# Altium PCB demo_dermis_chip1_package.PcbDoc (part 1 of 2)
Units mm, origin at the board's own origin, x right, y up, seen from the top; angles counter-clockwise.
Board outline 51.99 x 52.15 mm, 2 copper layers (Top Layer, Bottom Layer); 25 components, 82 nets, 198 pads, 241 vias.
Unrouted connection lines stored in the file: 1.
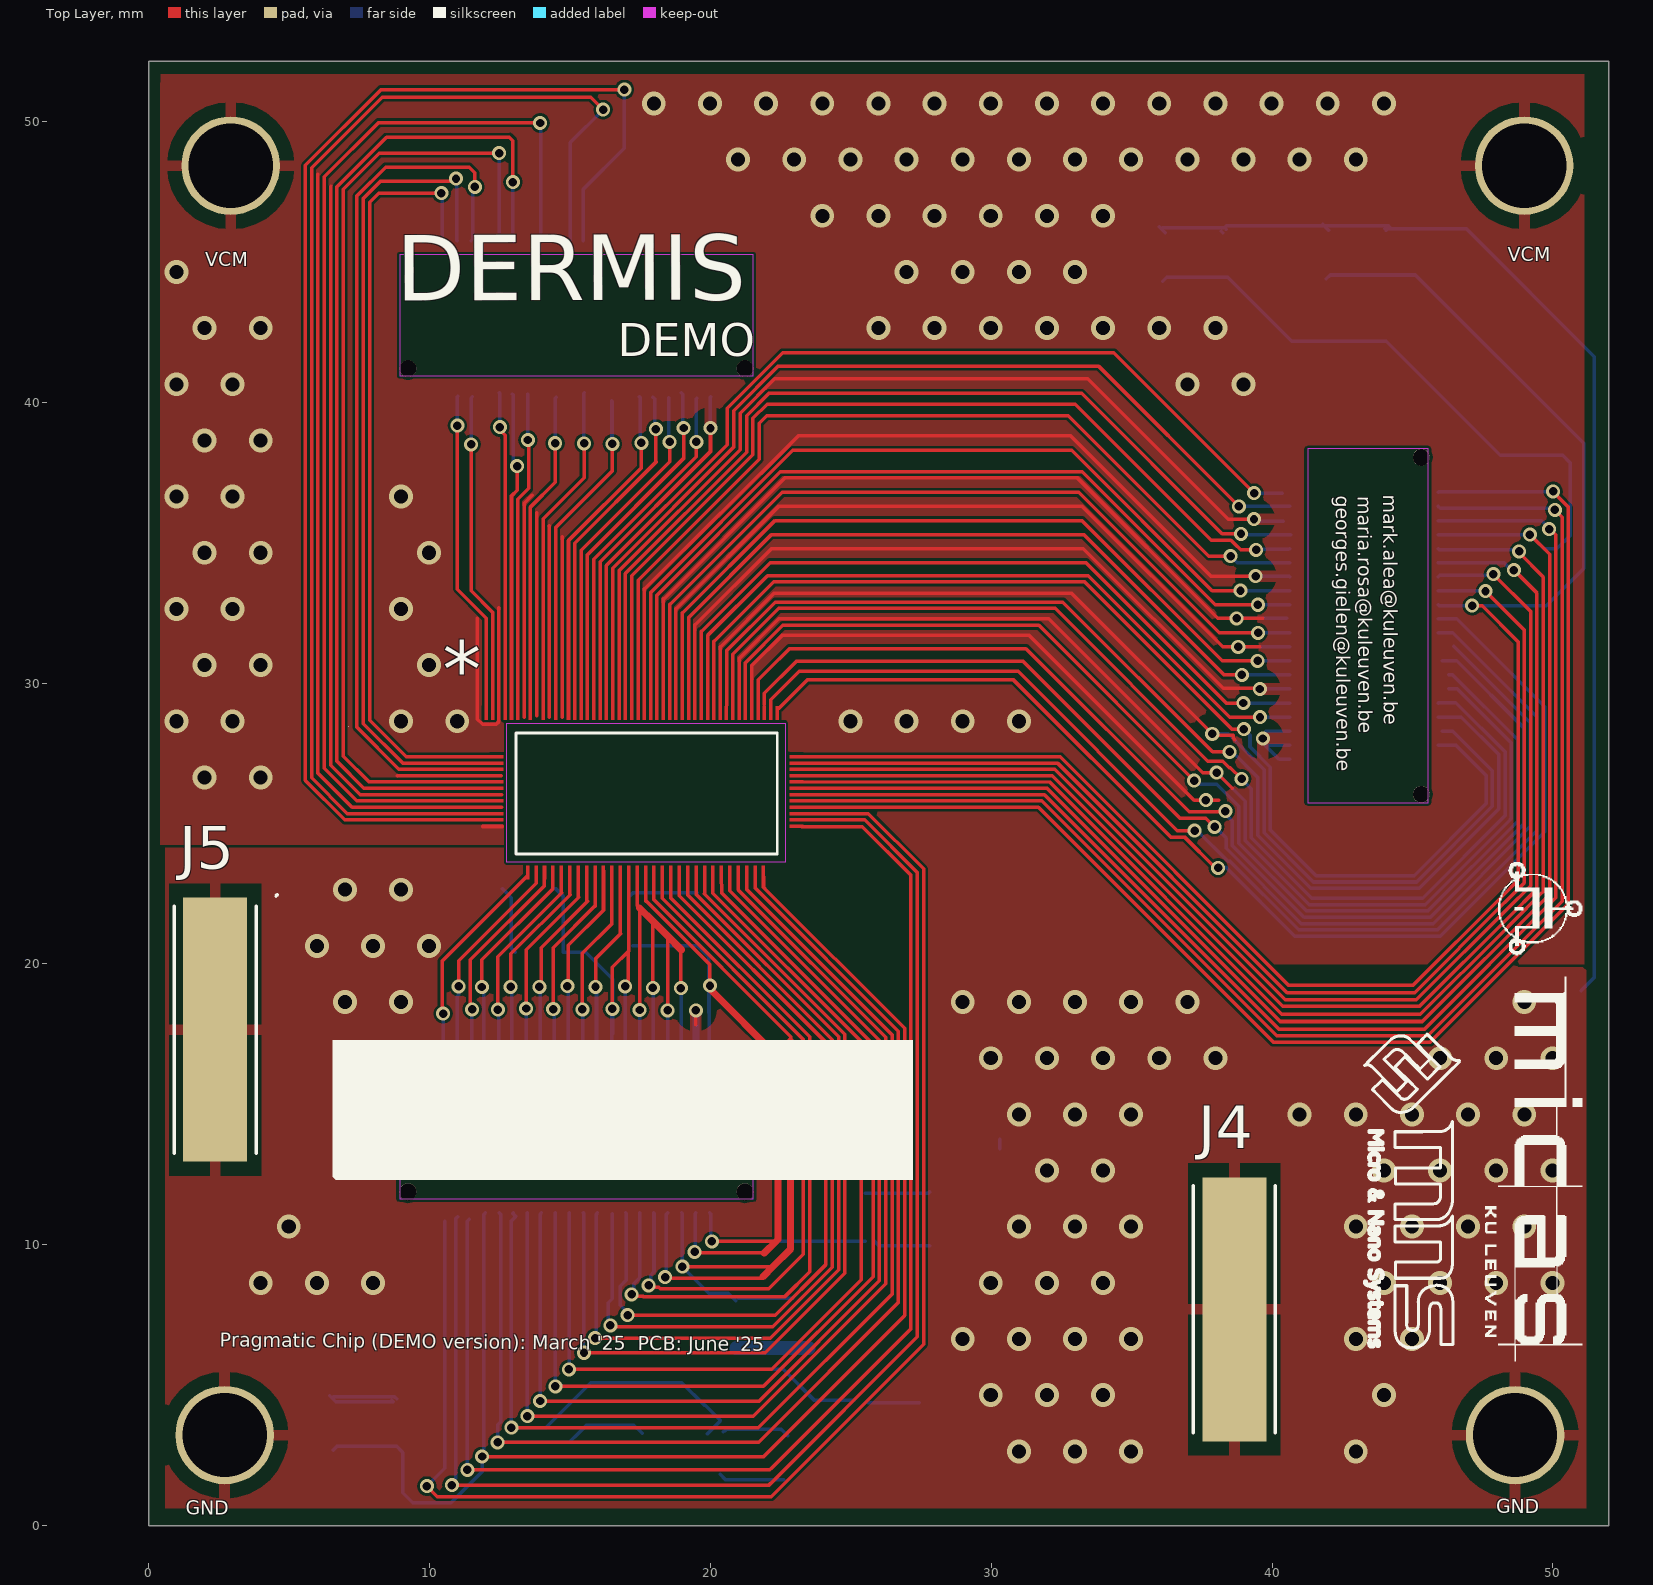
[diagram p0: Top Layer view]
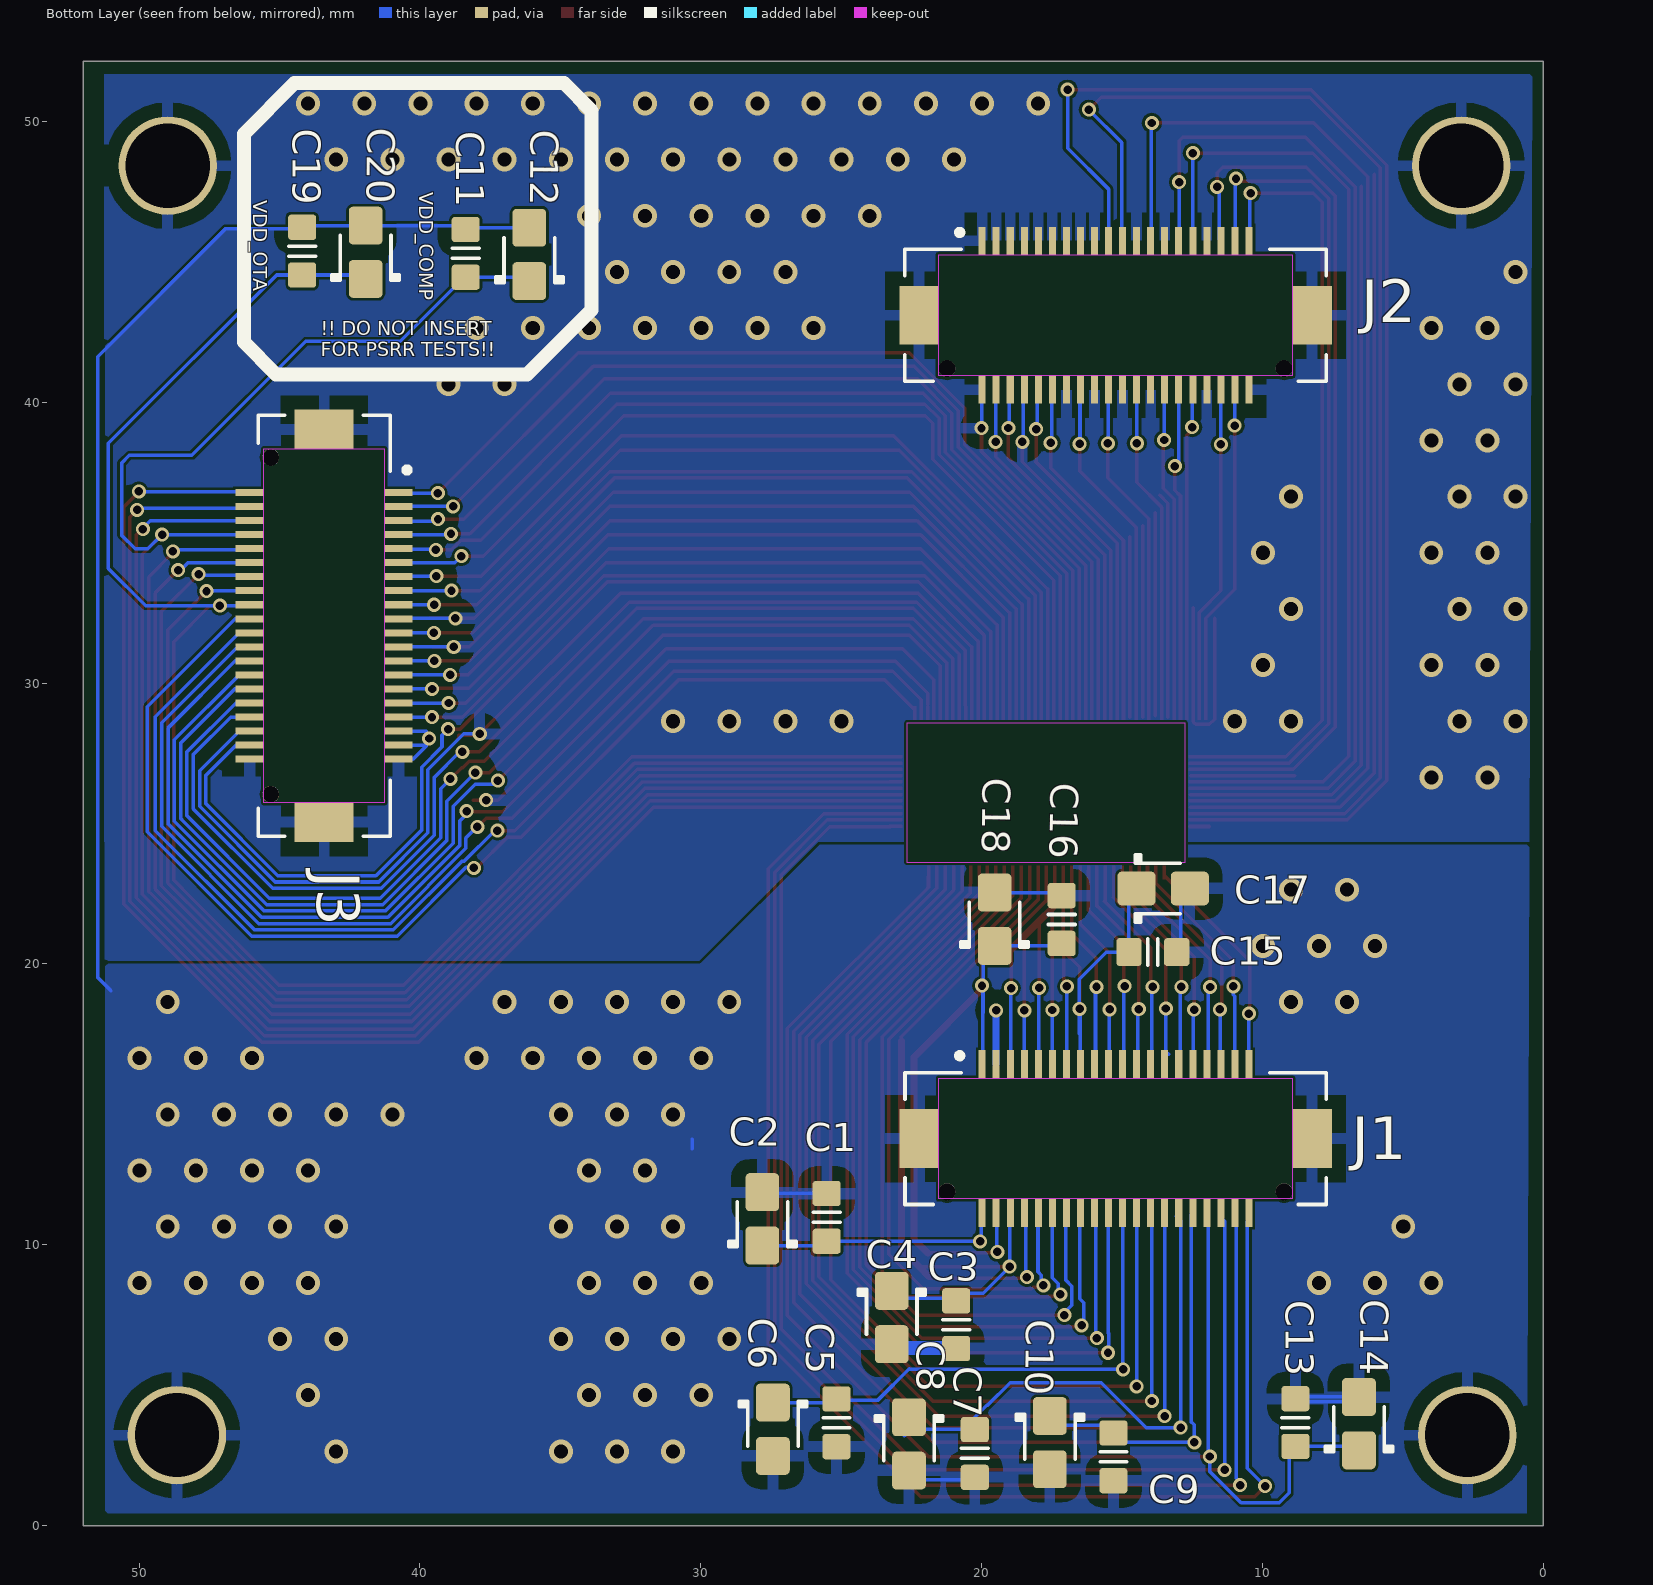
[diagram p1: Bottom Layer view, seen from below]
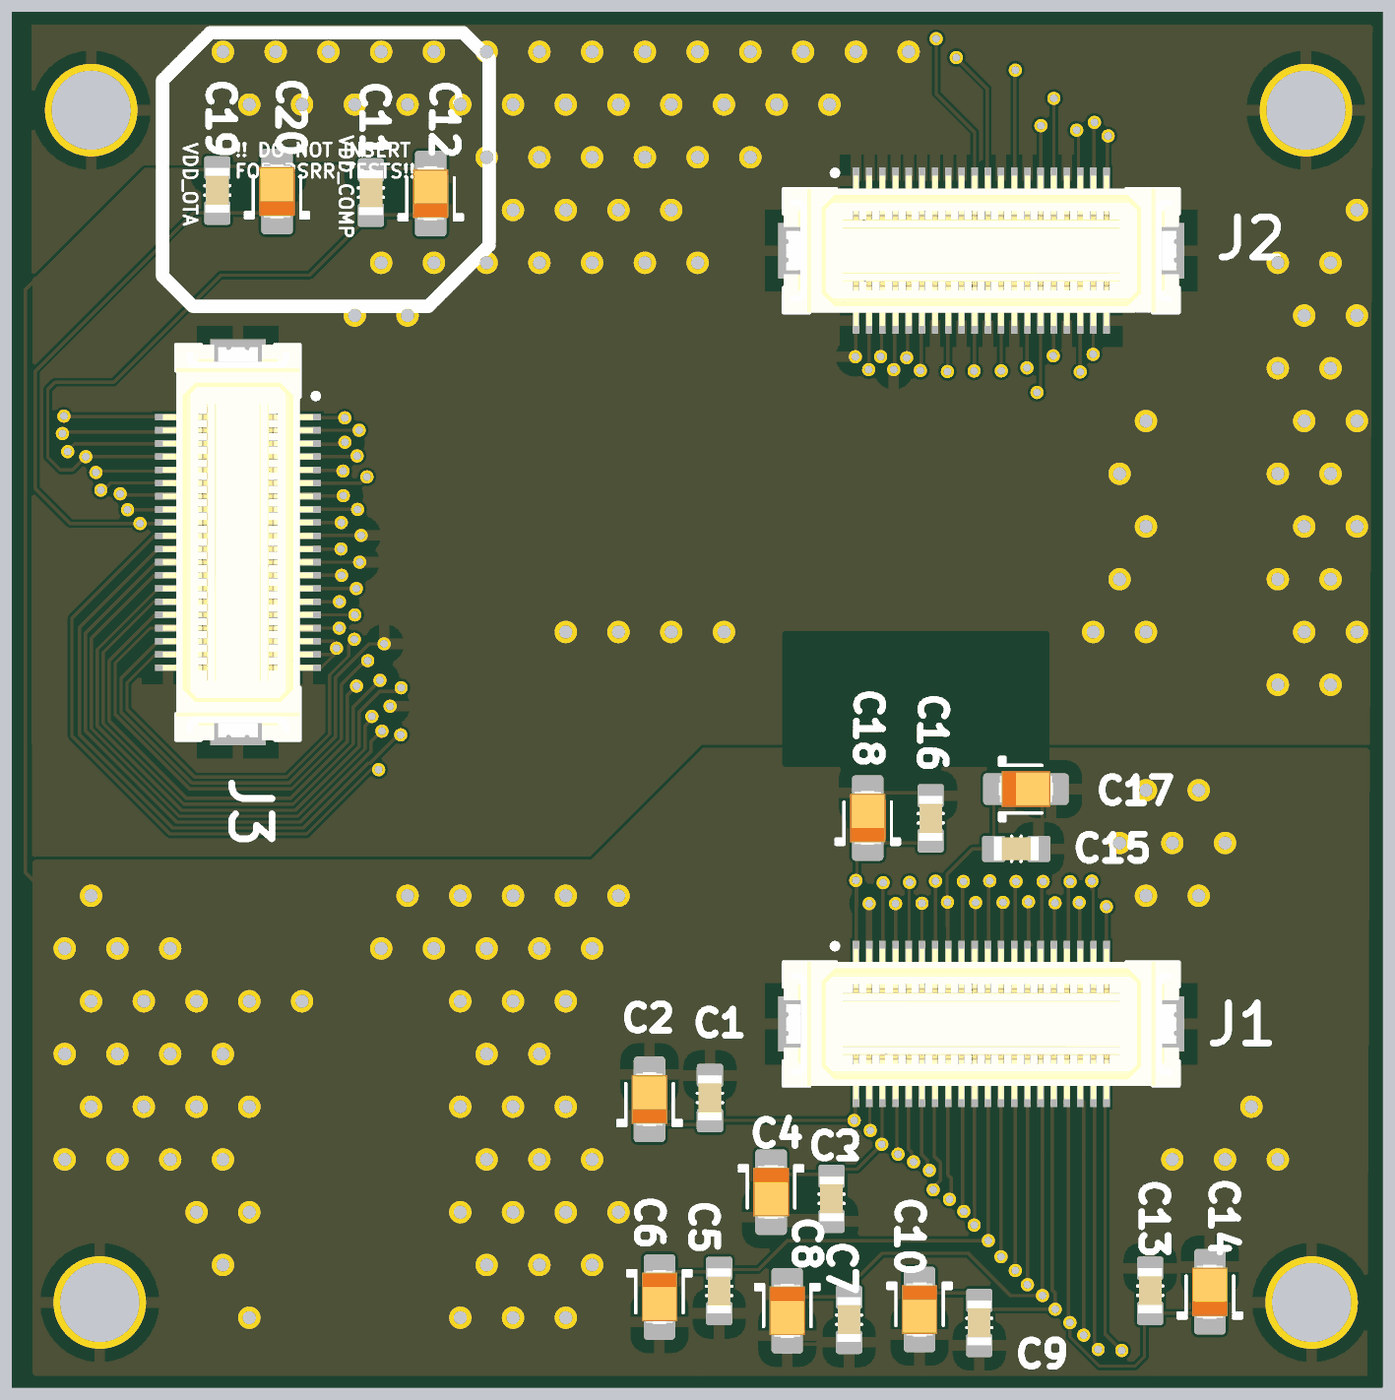
[diagram p3: 3D render of the assembled board from below, using the file's embedded part models]

## Layer stack, top to bottom
Top Solder: solder mask 0.0102, Solder Resist, Dk 3.5
Top Layer: signal copper 0.0356
Dielectric 1: dielectric 0.32, FR-4, Dk 4.8
Bottom Layer: signal copper 0.0356
Bottom Solder: solder mask 0.0102, Solder Resist, Dk 3.5

## Board outline
0,0 51.994,0 51.994,52.152 0,52.152

## Design rules (kind name [scope] priority, off if disabled: settings)
BoardOutlineClearance [All] p1: gap=0.25 ignorepadtopadclearanceinfootprint=FALSE except(0: Arc-SplitContinuation Track-SplitContinuation SMDPad-SplitContinuation THPad-SplitContinuation Via-SplitContinuation Fill-SplitContinuation Poly-SplitContinuation Region-SplitContinuation Text-SplitContinuation)
Clearance Clearance-xPP-xTP-xTT [All] p1: gap=0.1 ignorepadtopadclearanceinfootprint=FALSE except(0: Arc-Hole Track-Hole SMDPad-Hole THPad-Hole Via-Hole Fill-Hole Poly-Hole Region-Hole Text-Hole)
ComponentClearance [All] p1: gap=0.25 collisioncheckmode=3 verticalgap=0.25 showdistances=FALSE
DiffPairsRouting [All] p1: maxlimit=0.25 minlimit=0.25 mostfreqgap=0.25 toplayer_minwidth=0.381 toplayer_maxwidth=0.381 toplayer_prefwidth=0.381 bottomlayer_minwidth=0.381 bottomlayer_maxwidth=0.381 bottomlayer_prefwidth=0.381 maxuncoupledlength=12.5
Height [All] p1: minheight=0 maxheight=25 prefheight=12.5
HoleSize HoleSize-PTH [All] p1: absolutevalues=TRUE maxlimit=2 minlimit=0.15 maxpercent=80.000 minpercent=20.000
HoleToHoleClearance [All] p1: gap=0.35 allowstackedmicrovias=TRUE
MinimumAnnularRing "Minimum IAR  <= 0.45mm" [((ObjectKind = 'Pad') OR (ObjectKind = 'Via')) And (Layer = 'MultiLayer') And (HoleDiameter <= AsMM(0.45))] p1: minimumring=0.125 // minimum inner annular ring for pads <= 0.45mm finished hole size
MinimumAnnularRing "Minimum IAR  > 0.45mm" [((ObjectKind = 'Pad') OR (ObjectKind = 'Via')) And (Layer = 'MultiLayer') And (HoleDiameter > AsMM(0.45))] p2: minimumring=0.125 // minimum inner annular ring for pads > 0.45mm finished hole size
MinimumAnnularRing Minimum-IAR [All] p3: minimumring=0.125
MinimumSolderMaskSliver [All] p1: minsoldermaskwidth=0.08
PlaneClearance PlaneClearance-IPI [All] p1: clearance=0.25
PlaneConnect [All] p1: planeconnectstyle=Relief reliefexpansion=0.15 reliefentries=4 reliefconductorwidth=0.4 reliefairgap=0.4
PolygonConnect PolygonConnect-xTW [All] p1: connectstyle=Relief reliefconductorwidth=0.4 reliefentries=4 polygonreliefangle="90 Angle" airgapwidth=0.5
RoutingCorners [All] p1: cornerstyle=45-Degree minsetback=2.5 maxsetback=2.5
RoutingVias "RoutingVias <= 0.45mm" [(ObjectKind = 'Via') And (HoleDiameter <= AsMM(0.45))] p1: holewidth=0.3 width=0.5 viastyle="Through Hole" minholewidth=0.15 minwidth=0.5 maxholewidth=0.3 maxwidth=0.5 useviatemplates=TRUE viatemplateguid#1={678C6236-A811-44EE-9C79-08C2DEEF3F28} viatemplatename#1=v50h30
RoutingVias "RoutingVias > 0.45mm" [(ObjectKind = 'Via') And (HoleDiameter > AsMM(0.45))] p2: holewidth=0.3 width=0.5 viastyle="Through Hole" minholewidth=0.5 minwidth=0.85 maxholewidth=0.5 maxwidth=1.25 useviatemplates=TRUE viatemplateguid#1={678C6236-A811-44EE-9C79-08C2DEEF3F28} viatemplatename#1=v50h30
SilkToSilkClearance [All] p1: silktosilkclearance=0.2
SilkToSolderMaskClearance SilkscreenOverComponentPads [IsPad] p1: minsilkscreentomaskgap=0.2 clearancetoexposedcopper=TRUE
SolderMaskExpansion [All] p1: expansion=0
UnRoutedNet [All] p1: checkbadconnections=TRUE
Width Width-xTW [All] p1: maxlimit=1.5 minlimit=0.1 preferedwidth=0.2
18 further rules are at their usual default settings.

## Components (designator, comment, footprint, x,y, rotation, side; value= is the part's Value field where it differs from the comment)
C1 "approved sub OK" CAPC1608N 25.516,10.977 r90 bottom value=100n
C2 "10µ" CAPMP2012X150USR 27.807,10.924 r90 bottom
C3 "approved sub OK" CAPC1608N 20.903,7.155 r270 bottom value=100n
C4 "10µ" CAPMP2012X150USR 23.198,7.41 r270 bottom
C5 "approved sub OK" CAPC1608N 25.166,3.66 r270 bottom value=100n
C6 "10µ" CAPMP2012X150USR 27.429,3.431 r270 bottom
C7 "approved sub OK" CAPC1608N 20.241,2.569 r270 bottom value=100n
C8 "10µ" CAPMP2012X150USR 22.585,2.909 r270 bottom
C9 "approved sub OK" CAPC1608N 15.303,2.448 r270 bottom value=100n
C10 "10µ" CAPMP2012X150USR 17.567,2.955 r270 bottom
C11 "approved sub OK" CAPC1608N 38.37,45.308 r90 bottom value=100n
C12 "10µ" CAPMP2012X150USR 36.106,45.268 r90 bottom
C13 "approved sub OK" CAPC1608N 8.823,3.669 r90 bottom value=100n
C14 "10µ" CAPMP2012X150USR 6.559,3.63 r90 bottom
C15 "approved sub OK" CAPC1608N 13.899,20.424 r180 bottom value=100n
C16 "approved sub OK" CAPC1608N 17.147,21.584 r90 bottom value=100n
C17 "10µ" CAPMP2012X150USR 13.532,22.688 r180 bottom
C18 "10µ" CAPMP2012X150USR 19.532,21.595 r90 bottom
C19 "approved sub OK" CAPC1608N 44.195,45.387 r90 bottom value=100n
C20 "10µ" CAPMP2012X150USR 41.931,45.347 r90 bottom
J1 "DF17(4.0)-40DS-0.5V(57)" HRS_DF17(4.0)-40DS-0.5V(57) 15.227,13.784 r180 bottom locked
J2 "DF17(4.0)-40DS-0.5V(57)" HRS_DF17(4.0)-40DS-0.5V(57) 15.228,43.103 r180 bottom
J3 "DF17(4.0)-40DS-0.5V(57)" HRS_DF17(4.0)-40DS-0.5V(57) 43.412,32.043 r270 bottom
J4 "S1711-46R" HARWIN_S1711-46R 38.66,7.7 r270 top
J5 "S1711-46R" HARWIN_S1711-46R 2.36,17.66 r270 top

## Footprints (in the part's own frame and the unit in brackets; to place one, negate y for a bottom-side part, rotate by r counter-clockwise, add the part's x,y. Pads: shape width x height; smd on the part's side, far side on the other; paste and mask are expansions set on the pad)
CAPC1608N [mm]
  round 0.254 on Mech14: 0(0,0)
  rrect25% 0.9x1 smd: 1(-0.85,0) 2(0.85,0)
  Top Layer pour cut-out: -0.4,0.6 0.4,0.6 0.4,-0.6 -0.4,-0.6
  silkscreen extent -0.18,-0.48 0.18,0.48, body extent -0.85,-0.45 0.85,0.45, height 0.89
CAPMP2012X150USR [mm]
  round 0.254 on Mech14: 0(0,0)
  rrect25% 1.35x1.2 smd: 1(-0.95,0) 2(0.95,0)
  Top Layer pour cut-out: -0.4,0.8 0.4,0.8 0.4,-0.8 -0.4,-0.8
  silkscreen extent -1,-1.2 0.6,1.2, body extent -1.02,-0.67 1.03,0.68, height 1.5
HARWIN_S1711-46R [mm]
  rect 9.4x2.28 smd: 1(0,0)
  silkscreen extent -4.39,-1.46 4.39,1.46
HRS_DF17(4.0)-40DS-0.5V(57) [mm]
  rect 0.25x1 smd: 1(-4.75,2.65) 2(-4.75,-2.65) 3(-4.25,2.65) 4(-4.25,-2.65) 5(-3.75,2.65) 6(-3.75,-2.65) 7(-3.25,2.65) 8(-3.25,-2.65) 9(-2.75,2.65) 10(-2.75,-2.65) 11(-2.25,2.65) 12(-2.25,-2.65) 13(-1.75,2.65) 14(-1.75,-2.65) 15(-1.25,2.65) 16(-1.25,-2.65) 17(-0.75,2.65) 18(-0.75,-2.65) 19(-0.25,2.65) 20(-0.25,-2.65) 21(0.25,2.65) 22(0.25,-2.65) 23(0.75,2.65) 24(0.75,-2.65) 25(1.25,2.65) 26(1.25,-2.65) 27(1.75,2.65) 28(1.75,-2.65) 29(2.25,2.65) 30(2.25,-2.65) 31(2.75,2.65) 32(2.75,-2.65) 33(3.25,2.65) 34(3.25,-2.65) 35(3.75,2.65) 36(3.75,-2.65) 37(4.25,2.65) 38(4.25,-2.65) 39(4.75,2.65) 40(4.75,-2.65)
  rect 1.4x2.1 smd: S1(-7,0) S2(7,0)
  round 0.6 hole 0.6 unplated: ""(-6,-1.9) ""(6,-1.9)
  Keep-Out Layer region: 6.3,-2.15 -6.301,-2.15 -6.301,2.15 6.3,2.15
  silkscreen extent -7.5,-2.35 7.5,3.05, body extent -7.5,-2.85 7.5,2.85, height 4.5

## Part data
C1 C3 C5 C7 C9 C11 C13 C15 C16 C19: library part CAPC_100n_0603, "Capacitor SMD Cer 100nF 10% 50V X7R 0603", Manufacturer 1="AVX Corporation", Manufacturer 2="TDK Corporation", Manufacturer Part Number 1=06035C104KAT2A, Manufacturer Part Number 2=C1608X7R1H104K, Package / Case="0603 (1608 Metric)", Ratings="50V; X7R", Supplier Part Number 1=478-5052-1-ND, Tolerance=±10%, ComponentLink1Description=http://www.avx.com/docs/Catalogs/cx7r.pdf, ComponentLink1URL=http://www.avx.com/docs/Catalogs/cx7r.pdf, ComponentLink2Description=http://product.tdk.com/capacitor/mlcc/en/documents/mlcc_commercial_general_en.pdf, ComponentLink2URL=http://product.tdk.com/capacitor/mlcc/en/documents/mlcc_commercial_general_en.pdf, Material=ceramic, Supplier 1=Digi-Key, Supplier 2=Digi-Key, Supplier Part Number 2=445-1314-1-ND
C2 C4 C6 C8 C10 C12 C14 C17 C18 C20: library part CAPT_10u_0805_10V, "Capacitor SMD Tantalum 10uF 20% 10V 0805", Manufacturer 1="AVX Corporation", Manufacturer Part Number 1=TAJP106M010RNJ, Package / Case="0805 (2012 metric)", Ratings=10V, Supplier Part Number 1=478-3281-1-ND, Tolerance=±20%, Material=Tantalum, Supplier 1=Digi-Key
J1 J2 J3: "recept, PC Board, Headers & Receptacles, gold, fit, straight, metal, pos, Connectors and Adapters, connector, Connect...", Package=None, Availability="In Stock", Check_prices=https://www.snapeda.com/parts/DF17(4.0)-40DS-0.5V(57)/Hirose+Electric+Co+Ltd/view-part/?ref=eda, MF="Hirose Electric", MP=DF17(4.0)-40DS-0.5V(57), Price=None, Purchase-URL=https://pricing.snapeda.com/search/part/DF17(4.0)-40DS-0.5V(57)/?ref=eda, SnapEDA_Link=https://www.snapeda.com/parts/DF17(4.0)-40DS-0.5V(57)/Hirose+Electric+Co+Ltd/view-part/?ref=snap
J4 J5: "RFI SHIELD CLIP TIN SMD", Package=None, Availability=Warning, Check_prices=https://www.snapeda.com/parts/S1711-46R/Harwin%20Inc./view-part/2172610/?ref=eda, MF="Harwin Inc.", MP=S1711-46R, Price=None, Purchase-URL=https://pricing.snapeda.com/search/part/S1711-46R/?ref=eda, SnapEDA_Link=https://www.snapeda.com/parts/S1711-46R/Harwin%20Inc./view-part/2172610/?ref=snap

## Free pads (board coordinates)
  round 3.508 hole 3 mask+0: 1(2.915,48.429) 2(48.978,48.431) 3(2.701,3.222) 4(48.654,3.222)

## Via types
v1: diameter 0.85, hole 0.5, Top Layer to Bottom Layer, 141 vias
v2: diameter 0.5, hole 0.3, Top Layer to Bottom Layer, 100 vias

## Nets (pads, with @x,y where several pads share a name; then routed paths per layer and width w, separated by ;. In a path a pad name is that pad's centre, name@x,y a point inside that pad or via, vN(x,y) a via of type N, cw(c..) or ccw(c..) an arc to the next point about the centre after c; other vN are vias at no path point)
ACK: J1.37 | length 7.8
  Top Layer w0.125: v2(11.035,19.201) 11.035,20.119 13.791,22.875 13.791,23.085
  Bottom Layer w0.125: J1.37@10.98,16.439 10.98,18.851 11.035,18.906 v2(11.035,19.201)
ADDRX0: J1.31 | length 7.5
  Top Layer w0.125: v2(12.431,18.376) 12.431,20.264 14.698,22.531 ; 14.69,22.531 14.69,23.023
  Bottom Layer w0.125: v2(12.431,18.376) 12.455,18.352 12.455,16.464 J1.31@12.48,16.439
ADDRX1: J1.29 | length 7.8
  Top Layer w0.125: v2(12.882,19.185) 12.892,19.195 12.892,20.36 15.002,22.469 ; 14.99,22.469 14.99,23.36
  Bottom Layer w0.125: v2(12.882,19.185) 12.93,19.138 12.93,16.482 J1.29@12.977,16.434
ADDRX2: J1.27 | length 7.4
  Top Layer w0.125: v2(13.438,18.415) 13.438,20.503 15.311,22.377 ; 15.289,22.377 15.289,23.404
  Bottom Layer w0.125: 13.337,16.78 13.438,16.88 v2(13.438,18.415)
ADDRY0: J1.25 | length 7.5
  Top Layer w0.125: v2@13.968,19.245 13.968,20.584 15.627,22.243 ; 15.59,22.243 15.59,23.268
  Bottom Layer w0.125: v2(13.908,19.185) 13.942,19.15 13.942,16.469 J1.25@13.977,16.434
AER_DIS: J1.36 | length 47.6
  Top Layer w0.125: v2(11.344,1.984) 22.111,1.984 22.161,2.034 27.141,7.013 27.141,23.165 25.412,24.894 23.247,24.894
  Bottom Layer w0.125: v2(11.344,1.984) 11.344,10.842 J1.36@11.412,10.911
AGND: J1.10 | length 24.4
  Top Layer w0.125: v2(17.795,8.554) 17.867,8.482 18.165,8.482 18.213,8.434 22.077,8.434 23.309,9.666 23.309,17.312 18.283,22.338 ; 18.289,22.338 18.289,23.268
  Bottom Layer w0.125: v2(17.795,8.554) 17.867,8.625 17.867,8.913 17.989,9.035 17.989,11.122 J1.10@17.977,11.134
CLK: J1.17 | length 7.3
  Top Layer w0.125: v2(15.906,19.185) 15.906,20.191 16.8,21.085 ; 16.789,21.085 16.789,23.333
  Bottom Layer w0.125: v2(15.906,19.185) 15.942,19.15 15.942,16.47 J1.17@15.977,16.434
CT_MODE: J1.19 | length 7.3
  Top Layer w0.125: v2(15.439,18.387) 15.439,20.378 16.492,21.431 16.492,23.325
  Bottom Layer w0.125: v2(15.439,18.387) 15.458,18.368 15.458,16.453 J1.19@15.477,16.434
GAIN_HI: J1.40 | length 52.1
  Top Layer w0.125: v2(9.899,1.404) 10.272,1.031 22.169,1.031 27.591,6.454 27.591,23.388 25.623,25.357 23.079,25.357
  Bottom Layer w0.125: v2(9.899,1.404) 10.533,2.038 J1.40@10.533,10.84
GND: C1.2 C2.2 C3.2 C4.2 C5.2 C6.2 C7.2 C8.2 C9.2 C10.2 C11.2 C12.2 C13.2 C14.2 C15.2 C16.2 C17.2 C18.2 C19.2 C20.2 J1.3 J1.S1 J1.S2 J4.1 J5.1 pad.3 pad.4 | length 60.7
  Top Layer w0.125: 19.478,17.828 v2(19.478,18.347)
  Bottom Layer w0.125: C14.2@6.439,4.62 6.653,4.406 8.702,4.406 C13.2@8.648,4.46 ; C14.2@6.559,4.58 8.763,4.58 C13.2@8.823,4.519 ; C17.2@12.582,22.688 12.909,22.36 12.909,20.564 C15.2@13.049,20.424 ; C16.2@17.147,22.434 17.258,22.545 C18.2@19.532,22.545 ; C7.2@20.344,1.825 20.528,1.641 C8.2@22.608,1.641 ; C3.2@20.903,6.305 C3.2@20.925,6.326 ; C1.2@25.516,11.827 27.76,11.827 C2.2@27.807,11.874 C2.2@27.784,11.898 ; 30.31,13.426 30.31,13.755 ; C12.2@35.986,46.259 C12.2@36.2,46.045 ; C12.2@36.106,46.218 38.31,46.218 C11.2@38.37,46.158 ; C11.2@38.195,46.099 C11.2@38.249,46.045 ; C11.2@38.37,46.297 C20.2@41.851,46.297 ; C20.2@41.811,46.338 C20.2@41.851,46.297 ; C20.2@42.025,46.124 C20.2@41.851,46.297 ; C19.2@44.074,46.124 44.02,46.178 46.924,46.178 51.473,41.629 51.473,19.519 51.009,19.055 ; C19.2@44.195,46.237 44.135,46.297 C20.2@41.931,46.297 C20.2@41.851,46.297
  Bottom Layer w0.25: J1.3@19.478,16.421 v2(19.478,18.347)
  Bottom Layer w0.5: C3.2@20.925,6.326 C4.2@23.49,6.326
  other v1: 30.983,2.645 32.983,2.645 34.983,2.645 42.983,2.645 29.983,4.645 31.983,4.645 33.983,4.645 43.983,4.645 28.983,6.645 30.983,6.645 32.983,6.645 34.983,6.645 42.983,6.645 44.983,6.645 3.983,8.645 5.983,8.645 7.983,8.645 29.983,8.645 31.983,8.645 33.983,8.645 43.983,8.645 45.983,8.645 47.983,8.645 49.983,8.645 4.983,10.645 30.983,10.645 32.983,10.645 34.983,10.645 42.983,10.645 44.983,10.645 46.983,10.645 48.983,10.645 31.983,12.645 33.983,12.645 43.983,12.645 45.983,12.645 47.983,12.645 49.983,12.645 30.983,14.645 32.983,14.645 34.983,14.645 40.983,14.645 42.983,14.645 44.983,14.645 46.983,14.645 48.983,14.645 29.983,16.645 31.983,16.645 33.983,16.645 35.983,16.645 37.983,16.645 45.983,16.645 47.983,16.645 49.983,16.645 6.983,18.645 8.983,18.645 28.983,18.645 30.983,18.645 32.983,18.645 34.983,18.645 36.983,18.645 48.983,18.645 5.983,20.645 7.983,20.645 9.983,20.645 6.983,22.645 8.983,22.645
IBIAS_ADAPT: J1.28 | length 38.6
  Top Layer w0.125: v2(13.478,3.896) 21.529,3.896 26.241,8.608 26.241,17.388 20.993,22.636 ; 20.989,22.636 20.989,23.078
  Bottom Layer w0.125: v2(13.478,3.896) J1.28@13.477,11.134
IBIAS_AFE: J1.26 | length 37.1
  Top Layer w0.125: v2(13.936,4.436) 21.734,4.436 26.016,8.718 26.016,17.28 20.684,22.612 ; 20.689,22.612 20.689,23.064
  Bottom Layer w0.125: v2(13.936,4.436) 13.936,11.093 J1.26@13.977,11.134
IBIAS_SLEW: J1.24 | length 36.3
  Top Layer w0.125: v2(14.479,4.957) 21.888,4.957 25.791,8.859 25.791,17.134 20.394,22.531 ; 20.394,22.531 20.389,23.157 20.394,22.531
  Bottom Layer w0.125: J1.24@14.477,11.134 14.479,11.133 v2(14.479,4.957)
RATIOMODE0: J1.23 | length 7.5
  Top Layer w0.125: v2(14.402,18.394) 14.402,20.581 15.885,22.064 ; 15.889,22.064 15.889,23.247
  Bottom Layer w0.125: v2(14.402,18.394) 14.439,18.356 14.439,16.472 J1.23@14.477,16.434
RATIOMODE1: J1.21 | length 7.4
  Top Layer w0.125: v2(14.907,19.21) 14.94,19.243 14.94,20.663 16.191,21.915 16.191,23.318
  Bottom Layer w0.125: v2(14.907,19.21) 14.942,19.174 14.942,16.47 J1.21@14.977,16.434
REQOFF: J1.33 | length 7.9
  Top Layer w0.125: v2(11.86,19.18) 11.86,20.154 14.377,22.672 ; 14.389,22.672 14.389,23.194
  Bottom Layer w0.125: v2(11.86,19.18) 11.927,19.112 11.927,18.216 11.92,18.208 11.92,16.499 J1.33@11.98,16.439
REQON: J1.35 | length 7.9
  Top Layer w0.125: v2(11.515,18.387) 11.447,18.454 11.447,20.149 14.089,22.791 14.089,23.221
  Bottom Layer w0.125: J1.35@11.48,16.439 11.497,16.457 11.497,18.369 v2(11.515,18.387)
RST: J1.39 | length 8
  Top Layer w0.125: v2(10.481,18.232) 10.441,18.272 10.441,20.101 13.465,23.124
  Bottom Layer w0.125: J1.39@10.48,16.439 10.481,16.441 v2(10.481,18.232)
SER_CLK: J1.14 | length 27.7
  Top Layer w0.125: v2(17.051,7.497) 22.311,7.497 24.113,9.299 24.113,17.202 18.889,22.426 18.889,23.209
  Bottom Layer w0.125: J1.14@16.977,11.134 17.008,11.103 17.008,8.752 16.783,8.526 16.783,7.847 17.051,7.579 v2(17.051,7.497)
SER_EN: J1.20 | length 31.7
  Top Layer w0.125: v2(15.496,6.156) 21.957,6.156 24.788,8.987 24.788,17.496 19.784,22.499 ; 19.788,22.499 19.788,23.204
  Bottom Layer w0.125: J1.20@15.477,11.134 15.486,11.125 15.486,6.856 15.477,6.847 15.477,6.174 v2(15.496,6.156)
SER_IN: J1.16 | length 29.1
  Top Layer w0.125: v2@16.48,7.085 22.216,7.085 24.338,9.206 24.338,17.307 19.188,22.456 19.188,23.43
  Bottom Layer w0.125: v2@16.361,7.204 16.361,7.941 16.499,8.079 J1.16@16.499,11.113
  other v2: 16.432,7.132
SER_OUT: J1.18 | length 30.3
  Top Layer w0.125: v2(15.89,6.676) 22.127,6.676 24.563,9.112 24.563,17.402 19.501,22.464 19.501,22.468 19.488,22.481 19.488,23.103
  Bottom Layer w0.125: v2(15.89,6.676) 15.933,6.719 15.933,11.091 J1.18@15.977,11.134
SPKGATE: J1.38 | length 49.8
  Top Layer w0.125: v2(10.794,1.444) 22.085,1.444 22.212,1.571 27.366,6.725 27.366,23.258 25.493,25.132 23.254,25.132
  Bottom Layer w0.125: v2(10.794,1.444) 10.794,1.545 10.931,1.683 10.931,10.937 J1.38@10.995,11.001
STATE_OUT: J1.12 | length 26
  Top Layer w0.125: v2(17.195,8.235) 17.267,8.163 17.602,8.163 17.625,8.141 22.637,8.141 23.534,9.038 23.534,17.405 18.589,22.35 18.589,23.258
  Bottom Layer w0.125: v2(17.195,8.235) 17.267,8.307 17.267,8.608 17.483,8.825 17.483,11.128 J1.12@17.477,11.134
VCM: C13.1 C14.1 J1.34 J2.1 J2.2 J2.3 J2.5 J2.7 J2.8 J2.9 J2.11 J2.13 J2.14 J2.15 J2.17 J2.18 J2.22 J2.23 J2.26 J2.27 J2.33 J2.34 J2.40 J2.S1 J2.S2 J3.5 J3.13 J3.19 J3.23 J3.29 J3.30 J3.35 J3.36 J3.37 J3.39 J3.40 J3.S1 J3.S2 pad.1 pad.2 | length 436.1
  Top Layer w0.124: 8.844,26.707 12.544,26.707 ; 17.645,29.173 17.645,33.358
  Top Layer w0.125: 6.023,48.119 6.023,26.795 7.236,25.582 9.456,25.582 ; 6.475,47.698 6.475,30.627 6.475,27.079 7.522,26.032 12.575,26.032 ; 8.79,25.582 12.573,25.582 ; 11.696,32.319 11.696,28.721 11.885,28.532 12.371,28.532 12.434,28.595 ; v2(11.866,2.459) 21.892,2.459 26.916,7.483 26.916,17.709 21.94,22.686 21.94,22.689 21.889,22.739 21.889,23.099 ; 11.882,24.897 12.581,24.897 ; 12.464,28.628 12.464,32.686 ; 13.365,28.794 13.365,36.406 13.646,36.686 ; 13.815,28.839 13.815,29.78 13.816,36.074 ; 14.266,28.787 14.266,35.61 ; 14.717,28.787 14.718,28.788 14.718,30.774 14.717,35.213 ; 15.394,29.049 15.394,34.728 18.552,37.886 ; 16.07,29.146 16.07,34.319 20.001,38.251 v2(20.001,39.082) ; 16.745,29.122 16.745,34.004 21.054,38.314 21.054,39.613 22.282,40.84 33.438,40.84 38.438,35.84 v2(39.358,35.84) ; 17.655,33.358 23.134,38.813 32.824,38.813 37.824,33.813 v2(39.418,33.813) ; 18.32,29.188 18.32,33.009 ; 18.348,33.009 22.648,37.308 33.072,37.308 38.072,32.308 v2(38.742,32.308) 39.661,32.308 ; 18.547,37.886 v2(18.547,38.593) ; 18.77,29.204 18.77,32.656 ; 18.784,32.656 22.422,36.293 33.244,36.293 38.244,31.293 v2(38.796,31.293) 39.553,31.293 ; 19.445,29.149 19.445,32.079 ; 19.46,32.079 22.174,34.793 33.282,34.793 38.257,29.818 v2@39.565,29.818 ; 20.347,29.199 20.347,31.303 ; 20.362,31.303 22.254,33.195 32.87,33.195 v2(37.87,28.195) 37.924,28.142 38.616,28.142 38.616,28.038 38.666,27.988 ; 21.022,29.212 21.022,30.881 22.437,32.296 32.044,32.296 37.527,26.813 v2(38.029,26.813) 38.586,26.257 ; 21.472,29.214 21.472,30.615 22.557,31.7 31.354,31.7 37.222,25.832 v2(37.645,25.832) 38.108,25.832
  Bottom Layer w0.125: C14.1@6.559,2.68 6.699,2.819 C13.1@8.823,2.819 9.04,2.603 9.04,1.168 9.392,0.816 10.759,0.816 11.866,1.922 v2(11.866,2.459) 11.921,2.515 11.921,11.079 J1.34@11.977,11.134 ; J2.8@18.51,40.159 18.512,40.157 18.512,38.628 v2(18.547,38.593) ; v2(20.001,39.082) 19.989,39.094 19.989,40.181 J2.2@20.013,40.204 ; v2(37.87,28.195) 38.437,28.195 39.716,26.916 39.716,24.677 41.473,22.92 45.151,22.92 47.846,25.615 47.846,26.885 46.437,28.293 J3.36@46.062,28.293 ; v2(38.029,26.813) 39.04,25.802 39.04,24.398 41.324,22.114 45.455,22.114 48.389,25.049 48.521,25.18 48.521,25.335 48.521,27.648 48.521,27.871 46.598,29.794 J3.30@46.299,29.794 ; v2(38.742,32.308) J3.19@40.518,32.308 ; v2(38.796,31.293) J3.23@40.623,31.293 ; v2@39.413,35.763 J3.5@40.405,35.763 ; v2(39.418,33.813) 39.428,33.803 40.614,33.803 J3.13@40.623,33.793 ; v2(39.565,29.793) J3.29@40.623,29.793 ; v2(39.675,28.03) v2@39.781,28.03 ; 39.781,28.293 v2@39.781,28.03 ; 39.781,28.293 J3.35@40.623,28.293 ; J3.39@40.623,27.293 40.248,27.293 39.796,27.746 39.781,27.746 ; J3.37@40.623,27.793 39.828,27.793 39.781,27.746 ; 39.781,27.746 v2@39.781,28.03
  other v1: 1.983,26.645 3.983,26.645 0.983,28.645 2.983,28.645 8.983,28.645 10.983,28.645 24.983,28.645 26.983,28.645 28.983,28.645 30.983,28.645 1.983,30.645 3.983,30.645 9.983,30.645 0.983,32.645 2.983,32.645 8.983,32.645 1.983,34.645 3.983,34.645 9.983,34.645 0.983,36.645 2.983,36.645 8.983,36.645 1.983,38.645 3.983,38.645 0.983,40.645 2.983,40.645 36.983,40.645 38.983,40.645 1.983,42.645 3.983,42.645 25.983,42.645 27.983,42.645 29.983,42.645 31.983,42.645 33.983,42.645 35.983,42.645 37.983,42.645 0.983,44.645 26.983,44.645 28.983,44.645 30.983,44.645 32.983,44.645 23.983,46.645 25.983,46.645 27.983,46.645 29.983,46.645 31.983,46.645 33.983,46.645 20.983,48.645 22.983,48.645 24.983,48.645 26.983,48.645 28.983,48.645 30.983,48.645 32.983,48.645 34.983,48.645 36.983,48.645 38.983,48.645 40.983,48.645 42.983,48.645 17.983,50.645 19.983,50.645 21.983,50.645 23.983,50.645 25.983,50.645 27.983,50.645 29.983,50.645 31.983,50.645 33.983,50.645 35.983,50.645 37.983,50.645 39.983,50.645 41.983,50.645 43.983,50.645
VDD_COMP: C11.1 C12.1 J3.8 | length 70
  Top Layer w0.125: 23.277,26.257 31.987,26.257 40.292,17.952 45.35,17.952 49.884,22.486 49.884,34.592 v2(49.182,35.293)
  Bottom Layer w0.125: C12.1@36.106,44.318 36.246,44.458 C11.1@38.37,44.458 38.42,44.458 40.702,42.176 44.065,42.176 48.126,38.115 50.346,38.115 50.628,37.833 50.628,35.274 50.141,34.787 49.689,34.787 v2(49.182,35.293) J3.8@45.923,35.293
VDD_DIG_3V: C3.1 C4.1 J1.6 J1.8 | length 32.2
  Top Layer w0.125: 17.989,23.258 17.989,22.282 22.859,17.412 22.859,17.259 ; v2(18.384,8.846) 18.422,8.809 21.869,8.809 21.869,8.862 ; v2(19,9.221) 22.228,9.221
  Top Layer w0.25: 21.869,8.862 22.228,9.221 22.859,9.852 22.859,17.259
  Bottom Layer w0.125: v2(18.384,8.846) 18.43,8.892 18.43,11.088 J1.8@18.477,11.134 ; J1.6@18.977,11.134 18.988,11.123 18.988,9.232 v2(19,9.221) 19.941,8.28 20.628,8.28 C3.1@20.903,8.005 ; C3.1@20.987,8.089 C4.1@22.927,8.089
VDD_DIG_6V: C1.1 C2.1 C16.1 C18.1 J1.1 J1.2 J1.4 | length 40.3
  Top Layer w0.125: 17.689,22.243 17.689,23.361 ; 17.71,22.243 19.983,19.97 v2(19.983,19.226) ; v2(19.436,9.745) 19.47,9.711 21.915,9.711 ; v2(20.047,10.123) 22.328,10.123 ; 22.332,10.127 22.328,10.123 ; 22.409,10.196 22.336,10.123 22.328,10.123
  Top Layer w0.25: v2(19.983,19.226) 19.983,19.105 22.409,16.679 22.409,10.196 ; 21.915,9.711 22.328,10.123
  Bottom Layer w0.125: C16.1@17.236,20.645 C18.1@19.532,20.645 C18.1@19.942,20.235 ; v2(19.436,9.745) 19.456,9.766 19.456,11.114 J1.4@19.477,11.134 ; v2@19.926,19.162 v2@19.942,19.146 ; 19.942,18.27 v2@19.942,19.146 ; J1.1@19.963,16.436 v2@19.963,19.125 ; J1.2@19.977,11.134 20.012,11.099 20.012,10.158 v2(20.047,10.123) ; v2(19.983,19.226) 19.983,19.187 v2@19.942,19.146 ; v2@20.055,10.127 C1.1@25.516,10.127 ; C1.1@25.844,10.127 25.997,9.974 C2.1@27.807,9.974 ; v2@19.942,19.146 C18.1@19.942,20.235 ; v2@19.942,19.146 C18.1@19.942,20.235 ; v2@19.942,19.146 C18.1@19.942,20.235
VDD_IO_3P3V: C15.1 C17.1 J1.13 J1.15 | length 21.5
  Top Layer w0.125: v2(16.509,18.402) 16.509,19.883 17.081,20.455 17.081,19.321 v2(16.961,19.201) ; 17.089,20.455 17.089,23.268
  Bottom Layer w0.125: C17.1@14.482,22.688 14.749,22.42 C15.1@14.749,20.424 15.555,20.424 16.526,19.454 ; J1.15@16.477,16.434 16.493,16.45 16.493,18.386 v2(16.509,18.402) ; v2(16.961,19.201) 16.969,19.192 16.969,16.442 J1.13@16.977,16.434 ; 16.526,17.509 16.526,19.454 ; 16.526,17.509 16.526,19.454 ; 16.526,17.509 16.526,19.454
VDD_OTA: C19.1 C20.1 J3.18 | length 63.1
  Top Layer w0.125: 23.14,27.384 23.142,27.382 32.452,27.382 40.597,19.236 45.017,19.236 48.163,22.382 48.759,22.978 48.759,31.482 47.489,32.752 47.136,32.752 v2(47.128,32.76)
  Bottom Layer w0.125: C20.1@41.931,44.397 42.071,44.537 C19.1@44.195,44.537 45.101,44.537 51.096,38.542 51.096,34.085 49.771,32.76 v2(47.128,32.76) 45.957,32.76 J3.18@45.923,32.793
VDD_TAXEL_3V: C5.1 C6.1 J1.22 | length 46.4
  Top Layer w0.125: v2(14.959,5.567) 22.181,5.567 25.369,8.755 25.369,17.238 20.088,22.519 20.088,23.219
  Bottom Layer w0.125: J1.22@14.977,11.134 14.968,11.125 14.968,5.576 v2(14.959,5.567) 22.567,5.567 ; 22.579,5.579 23.687,4.472 C5.1@25.128,4.472 ; C5.1@25.623,4.381 C6.1@27.429,4.381
VINN_COMP: J3.6 | length 49.7
  Top Layer w0.124: 23.136,26.032 31.895,26.032 40.257,17.669 45.413,17.669 50.108,22.364 50.108,35.279 v2@49.886,35.502
  Bottom Layer w0.124: J3.6@45.923,35.793 45.931,35.786 49.602,35.786 49.869,35.519 v2(49.869,35.484)
VINN_OTA: J3.16 | length 43.4
  Top Layer w0.125: 23.254,27.157 32.358,27.157 40.533,18.982 45.081,18.982 48.256,22.157 48.277,22.178 48.984,22.885 48.984,31.896 v2(47.6,33.28)
  Bottom Layer w0.125: J3.16@45.923,33.293 45.93,33.287 47.593,33.287 v2(47.6,33.28)
VINN_X0: J2.20 | length 11.8
  Top Layer w0.125: 14.041,29.161 14.041,35.858 15.501,37.318 ; 15.499,37.318 v2(15.499,38.54)
  Bottom Layer w0.125: v2(15.499,38.54) 15.489,38.551 15.489,40.325 J2.20@15.503,40.34
VINN_X0_2: J3.21 | length 29.4
  Top Layer w0.125: 18.545,29.188 18.545,32.815 ; 18.573,32.815 22.552,36.793 24.506,36.793 33.12,36.793 38.12,31.793 v2(39.506,31.793)
  Bottom Layer w0.125: v2(39.506,31.793) J3.21@40.623,31.793
VINN_X0_3: J3.28 | length 42.2
  Top Layer w0.125: 21.247,29.206 21.247,30.725 22.579,32.057 31.699,32.057 v2(37.225,26.531)
  Bottom Layer w0.125: v2(37.225,26.531) 37.358,26.399 38.031,26.399 38.816,25.614 38.816,24.304 41.231,21.889 45.548,21.889 48.746,25.087 48.746,27.985 46.437,30.293 J3.28@46.298,30.293
VINN_X1: J2.39 | length 27.8
  Top Layer w0.125: v2(10.418,47.454) 8.187,47.454 7.862,47.129 7.862,28.686 9.166,27.382 12.282,27.382
  Bottom Layer w0.125: v2(10.418,47.454) 10.448,47.424 10.448,45.783 J2.39@10.478,45.753
VINN_Y0: J2.32 | length 11.3
  Top Layer w0.125: v2(12.498,39.117) 12.498,39.015 12.689,38.824 12.689,32.707 12.689,32.706 12.689,29.078
  Bottom Layer w0.125: J2.32@12.48,40.34 12.488,40.333 12.488,39.127 v2(12.498,39.117)
VINN_Y0_1: J2.6 | length 12.7
  Top Layer w0.125: 15.62,29.094 15.62,34.578 19.042,38 v2(19.042,39.088)
  Bottom Layer w0.125: J2.6@18.961,40.34 19.01,40.291 19.01,39.12 v2(19.042,39.088)
VINN_Y0_2: J3.7 | length 33.9
  Top Layer w0.125: 16.97,29.203 16.97,33.9 ; 16.975,33.916 21.287,38.228 21.287,39.523 22.085,40.321 33.218,40.321 38.218,35.321 v2(38.895,35.321)
  Bottom Layer w0.125: v2@38.869,35.292 J3.7@40.673,35.292
VINN_Y0_3: J3.31 | length 26.7
  Top Layer w0.125: 19.671,29.187 19.671,31.849 ; 19.685,31.849 22.129,34.293 23.98,34.293 33.375,34.293 38.375,29.293 v2(38.98,29.293)
  Bottom Layer w0.125: v2(38.98,29.293) J3.31@40.623,29.293
VINN_Y1: J2.25 | length 51.8
  Top Layer w0.125: 12.28,25.807 7.408,25.807 6.248,26.967 6.248,48.031 8.184,49.967 ; 8.184,49.967 v2@13.936,49.967 ; 8.184,49.967 v2@13.936,49.967 ; 8.184,49.967 v2@13.936,49.967
  Bottom Layer w0.125: v2(13.936,49.95) 13.956,49.929 13.956,45.774 J2.25@13.977,45.753
VINP_COMP: J3.4 | length 50.8
  Top Layer w0.124: 23.194,25.806 23.195,25.807 31.802,25.807 40.164,17.445 41.595,17.445 45.543,17.445 50.333,22.234 50.333,35.905 v2(50.069,36.169)
  Bottom Layer w0.124: J3.4@45.923,36.293 45.985,36.231 50.007,36.231 v2(50.069,36.169)
VINP_OTA: J3.14 | length 44.8
  Top Layer w0.125: 23.259,26.932 23.384,26.932 32.265,26.932 40.473,18.724 45.141,18.724 48.499,22.082 ; v2(47.878,33.885) 49.209,32.554 49.209,22.792 48.374,21.957
  Bottom Layer w0.125: J3.14@45.923,33.793 45.969,33.839 47.832,33.839 v2(47.878,33.885)
VINP_X0: J2.28 | length 11.4
  Top Layer w0.125: 13.139,29.108 13.139,33.069 13.14,36.546 13.531,36.936 13.531,38.623 v2(13.495,38.66)
  Bottom Layer w0.125: J2.28@13.488,40.295 13.486,40.293 13.486,38.668 v2(13.495,38.66)
VINP_X0_2: J3.11 | length 33
  Top Layer w0.125: 17.42,29.215 17.42,33.673 ; 17.442,33.685 21.737,37.98 21.737,39.258 22.005,39.526 23.523,39.526 32.748,39.526 37.748,34.526 v2(38.523,34.526)
  Bottom Layer w0.125: v2(38.523,34.526) 38.755,34.293 J3.11@40.623,34.293